# Altium PCB UPCD_lamp-R000.PcbDoc
Units mm, origin at the board's own origin, x right, y up, seen from the top; angles counter-clockwise.
Board outline 58.5 x 41.73 mm, 2 copper layers (Top Layer, Bottom Layer), stack 1.601 mm thick; 36 components, 19 nets, 104 pads, 154 vias.
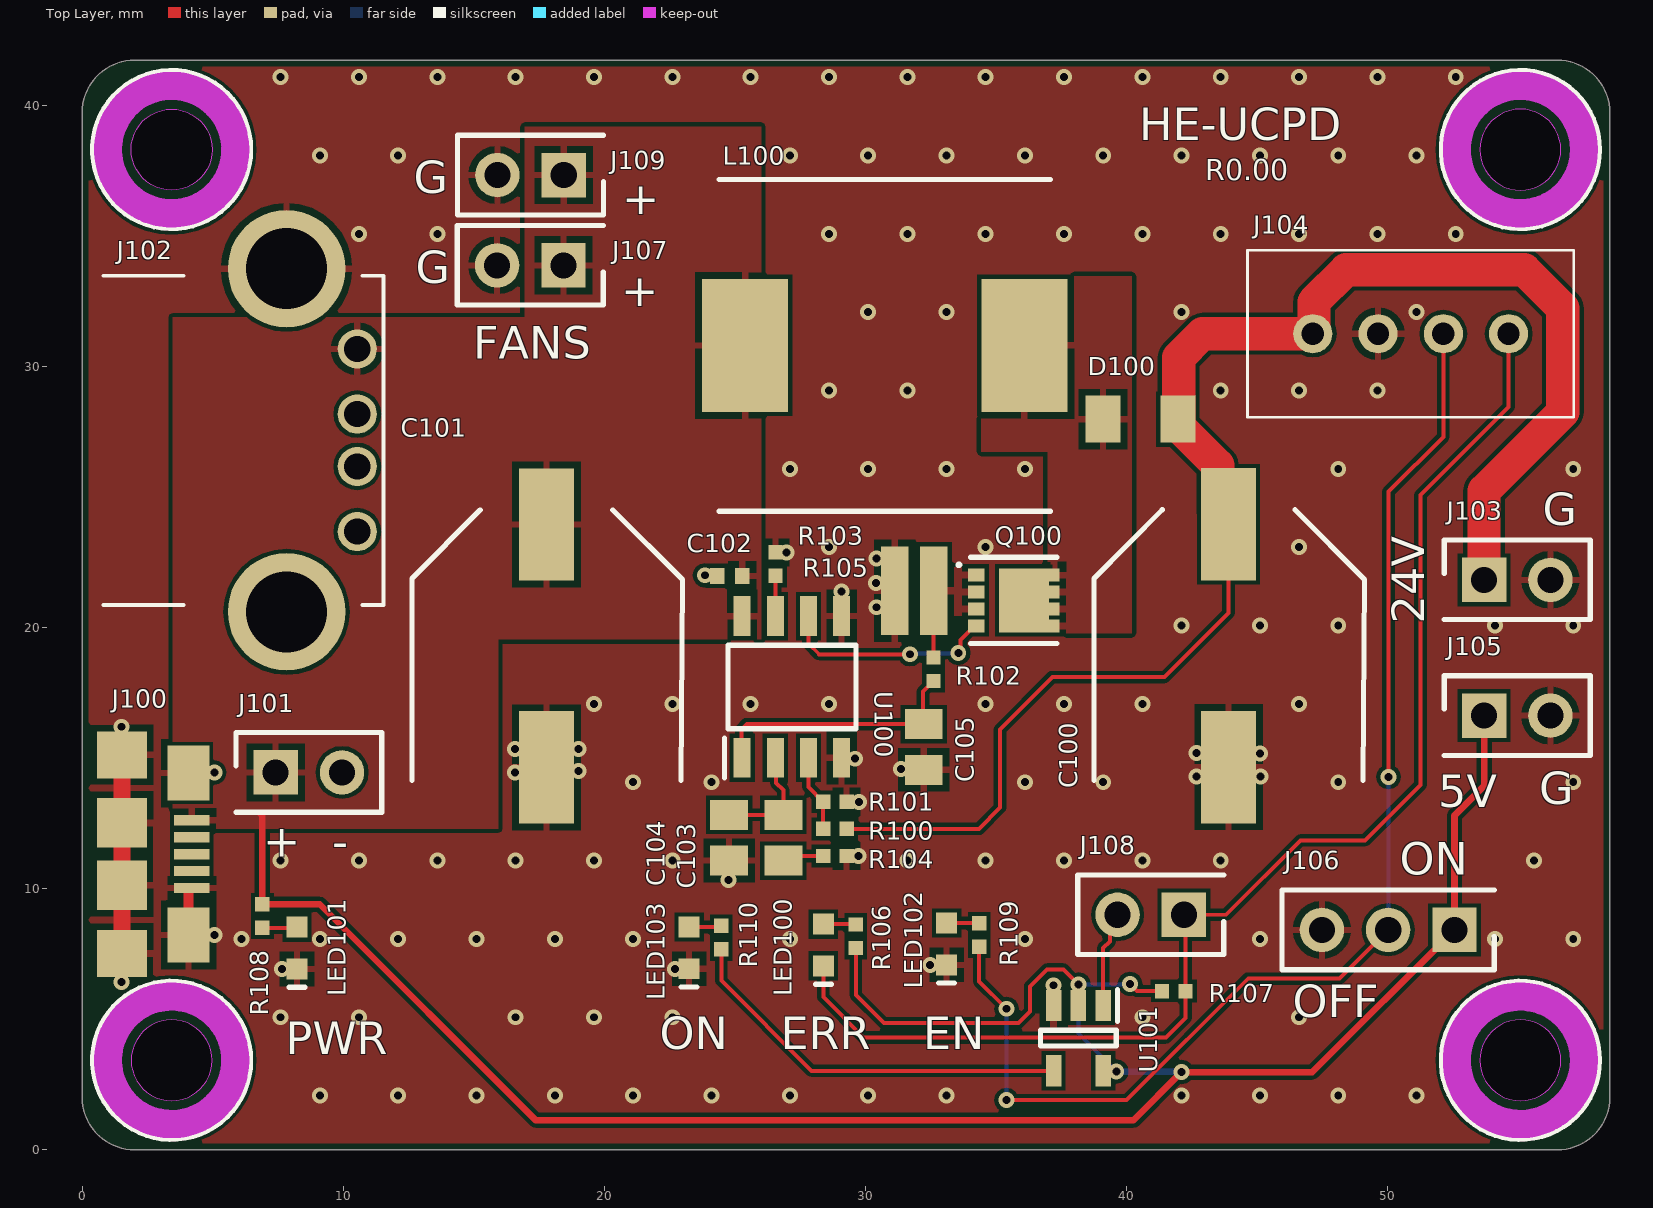
[diagram p0: Top Layer view]
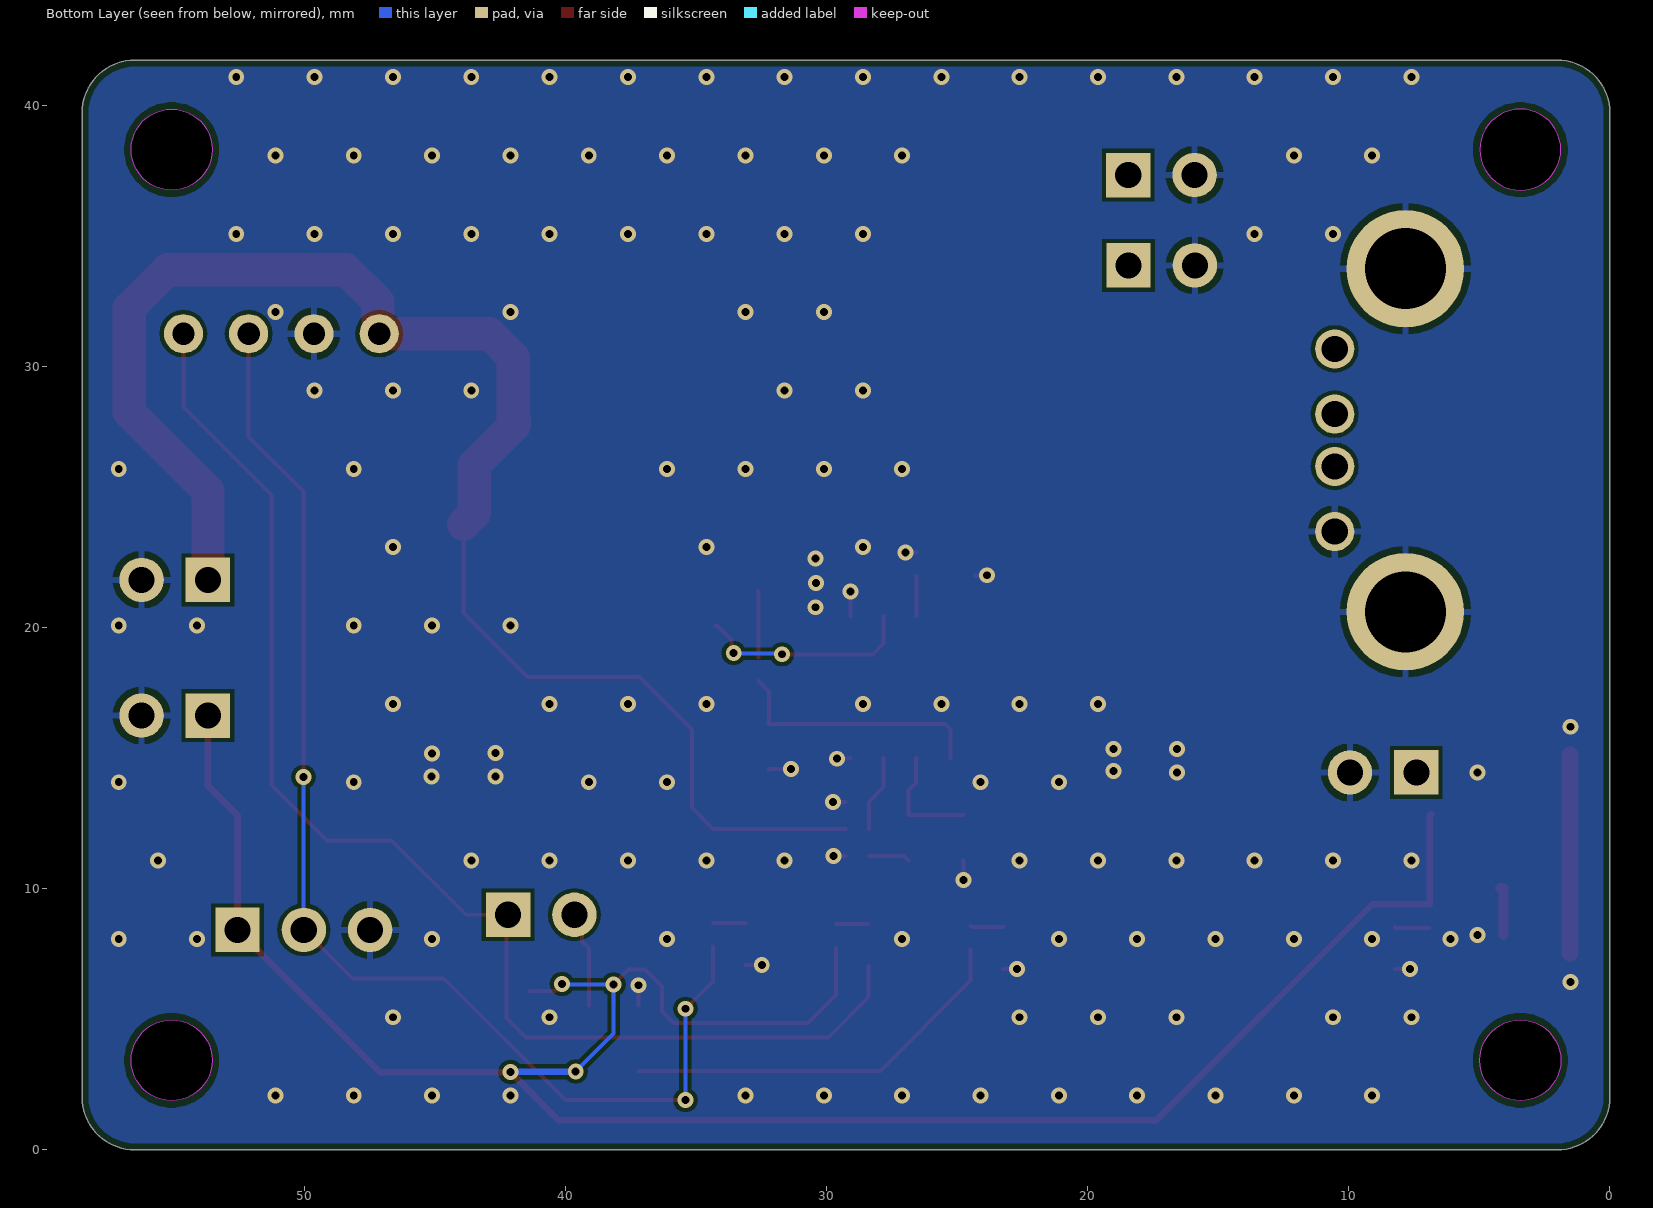
[diagram p1: Bottom Layer view, seen from below]
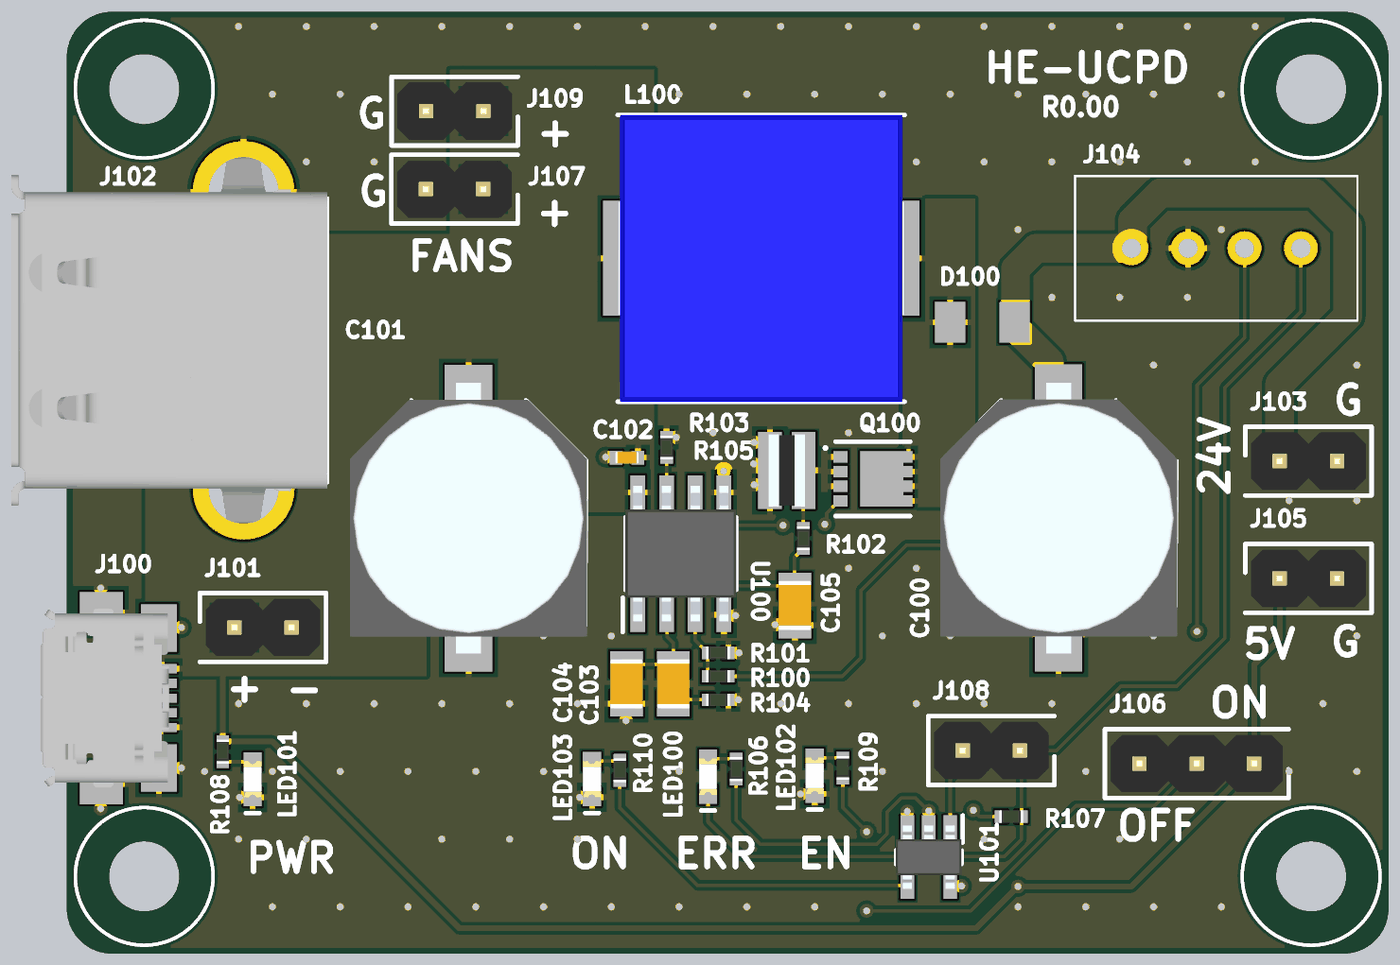
[diagram p2: 3D render of the assembled board from above, using the file's embedded part models]

## Layer stack, top to bottom
Top Solder: solder mask 0.0102, Solder Resist, Dk 3.5
Top Layer: signal copper 0.0356
Dielectric 1: dielectric 1.53, FR-4, Dk 4.8
Bottom Layer: signal copper 0.0356
Bottom Solder: solder mask 0.0102, Solder Resist, Dk 3.5

## Board outline
0,2 0,39.725 cw(c2,39.725) 2,41.725 56.5,41.725 cw(c56.5,39.725) 58.5,39.725 58.5,2 cw(c56.5,2) 56.5,0 2,0 cw(c2,2)
cut-out: 3.425,36.75 cw(c3.425,38.3) 1.875,38.3 cw(c3.425,38.3) 3.425,39.85 cw(c3.425,38.3) 4.975,38.3 cw(c3.425,38.3)
cut-out: 1.875,3.425 ccw(c3.425,3.425) 3.425,1.875 ccw(c3.425,3.425) 4.975,3.425 ccw(c3.425,3.425) 3.425,4.975 ccw(c3.425,3.425)
cut-out: 53.525,38.3 ccw(c55.075,38.3) 55.075,36.75 ccw(c55.075,38.3) 56.625,38.3 ccw(c55.075,38.3) 55.075,39.85 ccw(c55.075,38.3)
cut-out: 53.525,3.425 ccw(c55.075,3.425) 55.075,1.875 ccw(c55.075,3.425) 56.625,3.425 ccw(c55.075,3.425) 55.075,4.975 ccw(c55.075,3.425)

## Design rules (kind name [scope] priority, off if disabled: settings)
BoardOutlineClearance [All] p1: gap=0.254 ignorepadtopadclearanceinfootprint=FALSE
Clearance [All] p1: gap=0.152 ignorepadtopadclearanceinfootprint=FALSE
HoleSize [All] p1: absolutevalues=TRUE maxlimit=12.7 minlimit=0.025 maxpercent=80.000 minpercent=20.000
MinimumSolderMaskSliver [All] p1: minsoldermaskwidth=0.102
PolygonConnect [All] p1: thpad.connectstyle=Relief thpad.reliefconductorwidth=0.254 thpad.reliefentries=4 thpad.polygonreliefangle="90 Angle" thpad.airgapwidth=0.254 smdpad.connectstyle=Relief smdpad.reliefconductorwidth=0.254 smdpad.reliefentries=4 smdpad.polygonreliefangle="90 Angle" smdpad.airgapwidth=0.254 via.connectstyle=Direct via.reliefconductorwidth=0.254 via.reliefentries=4 via.polygonreliefangle="90 Angle" via.airgapwidth=0.254
RoutingVias [All] p1: holewidth=0.305 width=0.61 viastyle="Through Hole" minholewidth=0.305 minwidth=0.61 maxholewidth=0.711 maxwidth=1.27
SilkToSilkClearance [All] p1: silktosilkclearance=0.102
SilkToSolderMaskClearance [IsPad] p1: minsilkscreentomaskgap=0.102 clearancetoexposedcopper=TRUE
SolderMaskExpansion [All] p1: expansion=0.102
Width [All] p1: maxlimit=50.8 minlimit=0.152 preferedwidth=0.152
26 further rules are at their usual default settings.

## Classes and differential pairs
component class UCPD_lamp: C100 C101 C102 C103 C104 C105 D100 J100 J103 J104 J106 J108 J109 L100 LED100 LED101 LED102 LED103 Q100 R100 R101 R102 R103 R104 R105 R106 R107 R108 R109 R110 U100 U101

## Components (designator, comment, footprint, x,y, rotation, side; value= is the part's Value field where it differs from the comment)
C100 "EEH-ZA1V151P" CAPAE1030X1050N 43.9,19.3 r270 top value=150u
C101 "UUD1E221MNL1GS" CAPAE1030X1050N 17.78,19.296 r270 top value=220u
C102 "GRM155R70J104KA01D" CAPC1005X06N 24.795,21.975 r0 top value=100pF
C103 "CGA4J2C0G1H333J125AA" CAPC2012X14N 26.85,11.95 r90 top value=33n
C104 "C2012C0G1H152J060AA" CAPC2012X14N 24.775,11.95 r90 top value=1500p
C105 "08055A100JAT2A" CAPC2012X14N 32.225,15.425 r90 top value=10p
D100 "SS24FL" SOD-123FL 40.525,27.975 r0 top
J100 "10118192-0001LF" 10118192-0001LF 1.525,11.325 r270 top
J101 "PRPC002SAAN-RC" "HDR_1x2_0.100\"" 7.41,14.45 r0 top
J102 "292303-1" 292303-1 10.535,30.67 r270 top
J103 "PRPC002SAAN-RC" "HDR_1x2_0.100\"" 53.685,21.825 r0 top
J104 "B04B-XASK-1(LF)(SN)" B04B-XASK-1(LF)(SN) 54.625,31.25 r180 top
J105 "PRPC002SAAN-RC" "HDR_1x2_0.100\"" 53.685,16.625 r0 top
J106 "PRPC003SAAN-RC" "HDR 3x1 0.100\"" 52.553,8.421 r180 top
J107 "PRPC002SAAN-RC" "HDR_1x2_0.100\"" 18.431,33.869 r180 top
J108 "PRPC002SAAN-RC" "HDR_1x2_0.100\"" 42.19,9 r180 top
J109 "PRPC002SAAN-RC" "HDR_1x2_0.100\"" 18.44,37.325 r180 top
L100 "SRR1208-6R5ML" INDPM127127X850N 30.734,30.804 r0 top value=6u5
LED100 "150060VS75000" 0603_A 28.382,7.842 r90 top
LED101 "150060VS75000" 0603_A 8.225,7.725 r90 top
LED102 "150060VS75000" 0603_A 33.103,7.882 r90 top
LED103 "150060VS75000" 0603_A 23.244,7.732 r90 top
Q100 "CSD17304Q3" DQG_VSON-CLIP 35.678,21.037 r270 top
R100 "CRCW040218K2FKED" RESC1005X03N 28.825,12.287 r0 top value=18k2
R101 "CRCW04021K00FKEDC" RESC1005X03N 28.825,13.325 r180 top value=1k
R102 "CRCW0402100RFKEDC" RESC1005X03N 32.6,18.4 r90 top value=100R
R103 "CRCW040226K7FKED" RESC1005X03N 26.55,22.425 r270 top value=26k7
R104 "CRCW04024K87FKED" RESC1005X03N 28.825,11.25 r180 top value=4k87
R105 "PRL1632-R007-F-T1" RESC1632X60N 31.865,21.406 r0 top value=7m
R106 "RES: GENERAL" RESC1005X03N 29.625,8.175 r270 top value=287R
R107 "CRCW040218K2FKED" RESC1005X03N 41.8,6.075 r180 top value=18k2
R108 "RES: GENERAL" RESC1005X03N 6.9,8.95 r90 top value=287R
R109 "RES: GENERAL" RESC1005X03N 34.35,8.225 r270 top value=287R
R110 "RES: GENERAL" RESC1005X03N 24.475,8.125 r270 top value=287R
U100 "LM3478" SOIC127P600X175-8N 27.178,17.723 r90 top
U101 "SN74LVC1G126DBVR" SOT95P280X145-5N 38.15,4.275 r270 top

## Footprints (in the part's own frame and the unit in brackets; to place one, negate y for a bottom-side part, rotate by r counter-clockwise, add the part's x,y. Pads: shape width x height; smd on the part's side, far side on the other; paste and mask are expansions set on the pad)
0603_A [mm] "Chip LED, 2-Leads, Body 1.6x0.8mm, IPC Medium Density"
  rect 0.8x0.8 smd: 1(-0.8,0) 2(0.8,0)
  silkscreen extent -1.5,-0.3 -1.5,0.3, body extent -0.8,-0.4 0.8,0.4, height 0.7
292303-1 [mm] "CONN RCPT USB2.0 TYPEA 4POS R/A"
  round 1.5 hole 1: 1(0,0) 2(2.5,0) 3(4.5,0) 4(7,0)
  round 4.5 hole 3.1: 5(-3.07,-2.71) 6(10.07,-2.71)
  silkscreen extent -2.8,-9.72 9.8,1.01, body extent -4.62,-13 11.62,1, height 7.82
10118192-0001LF [mm] "SMD, 5-Leads, Body 8.05x5.77mm, Pitch 0.65mm"
  rect 0.4x1.35 smd: 1(-1.3,2.675) 2(-0.65,2.675) 3(0,2.675) 4(0.65,2.675) 5(1.3,2.675)
  rect 2.1x1.6 smd: 6(-3.1,2.55) 7(3.1,2.55)
  rect 1.8x1.9 smd: 8(-3.8,0) 9(3.8,0)
  rect 1.9x1.9 smd: 10(-1.2,0) 11(1.2,0)
  body extent -3.96,-2.67 3.96,2.99, height 2.75
B04B-XASK-1(LF)(SN) [mm]
  round 1.5 hole 0.85: 1(0,0) 2(2.5,0) 3(5,0) 4(7.5,0)
  silkscreen extent -2.5,-3.2 10,3.2
CAPAE1030X1050N [mm]
  rect 4.3x2.1 smd: 1(-4.65,0) 2(4.65,0)
  silkscreen extent -5.21,-5.15 5.15,5.21, body extent -6,-5.25 6,5.25, height 10.5
CAPC1005X06N [mm] "Chip Capacitor, 2-Leads, Body 1.00x0.50mm, IPC Medium Density (0402)"
  rect 0.56x0.62 smd: 1(-0.48,0) 2(0.48,0)
  body extent -0.53,-0.28 0.53,0.28, height 0.55
CAPC2012X14N [mm] "Chip Capacitor, 2-Leads, Body 2.00x1.25mm, IPC Medium Density (0805)"
  rect 1.15x1.45 smd: 1(-0.875,0) 2(0.875,0)
  body extent -1.1,-0.72 1.1,0.72, height 1.45
DQG_VSON-CLIP [mm]
  rect 0.5x0.63 smd: 1(-0.975,-1.435) 2(-0.325,-1.435) 3(0.325,-1.435) 4(0.975,-1.435)
  rect 0.5x0.41 smd: 5(0.975,1.545) 6(0.325,1.545) 7(-0.325,1.545) 8(-0.975,1.545)
  rect 2.45x1.9 smd: 9(0,0.39)
  silkscreen extent -1.65,-2.13 1.65,1.65
"HDR 3x1 0.100\"" [mm]
  rect 1.7x1.7 / inner round 1.7 / far side rect 1.7x1.7 hole 1: 1(0,0)
  round 1.7 hole 1: 2(2.54,0) 3(5.08,0)
  silkscreen extent -1.52,-1.52 6.6,1.52, body extent -1.27,-1.27 6.35,1.27, height 7.62
"HDR_1x2_0.100\"" [mm]
  rect 1.7x1.7 / inner round 1.7 / far side rect 1.7x1.7 hole 1: 1(0,0)
  round 1.7 hole 1: 2(2.54,0)
  silkscreen extent -1.52,-1.52 4.06,1.52, body extent -1.27,-1.27 3.81,1.27, height 7.62
INDPM127127X850N [mm]
  rect 3.3x5.1 smd: 1(-5.35,0) 2(5.35,0)
  silkscreen extent -6.35,-6.35 6.35,6.35, body extent -6.35,-6.35 6.35,6.35, height 8.5
RESC1005X03N [mm] "Chip Resistor, 2-Leads, Body 1.00x0.50mm, IPC Medium Density"
  rect 0.55x0.55 smd: 1(-0.45,0) 2(0.45,0)
  body extent -0.53,-0.28 0.53,0.28, height 0.35
RESC1632X60N [mm]
  rect 1.05x3.4 smd: 1(-0.75,0) 2(0.75,0)
  body extent -0.8,-1.6 0.8,1.6, height 0.6
SOD-123FL [mm]
  rect 1.34x1.8 smd: 1(-1.43,0) 2(1.43,0)
  body extent -1.5,-1 1.5,1, height 1.08
SOIC127P600X175-8N [mm]
  rect 1.525x0.65 smd: 1(-2.712,1.905) 2(-2.712,0.635) 3(-2.712,-0.635) 4(-2.712,-1.905) 5(2.712,-1.905) 6(2.712,-0.635) 7(2.712,0.635) 8(2.712,1.905)
  silkscreen extent -3.47,-2.45 1.6,2.58, body extent -3,-2.45 3,2.45, height 1.75
SOT95P280X145-5N [mm]
  rect 1.2x0.6 smd: 1(-1.25,0.95) 2(-1.25,0) 3(-1.25,-0.95) 4(1.25,-0.95) 5(1.25,0.95)
  silkscreen extent -1.85,-1.45 0.3,1.5, body extent -1.4,-1.45 1.4,1.45, height 1.45

## Part data
C100: "CAP ALUM POLY HYB 150UF 35V SMD", Manufacturer=Panasonic, Package="Radial, Can - SMD", Supplier Part Number 1=P15450CT-ND, Voltage=35V, Accuracy=20%, Manufacturer Part Number=EEH-ZA1V151P, Supplier 1=Digi-Key, Type=Aluminum
C101: "CAP ALUM 220UF 20% 25V SMD", Manufacturer=Nichicon, Package="Radial, Can - SMD", Supplier Part Number 1=493-2278-1-ND, Voltage=25V, Accuracy=20%, Manufacturer Part Number=UUD1E221MNL1GS, Supplier 1=Digi-Key, Type=Aluminum
C102: "CAP CER 0.1UF 6.3V X7R 0402", Manufacturer=Murata, Package=0402(1005m), Supplier Part Number 1=490-6319-1-ND, Voltage=6V3, Manufacturer Part Number=GRM155R70J104KA01D, Supplier 1=Digi-Key
C103: "CAP CER 0.033UF 50V C0G 0805", Manufacturer=TDK, Package=0805(2012m), Supplier Part Number 1=445-6950-1-ND, Voltage=50V, Accuracy=5%, Manufacturer Part Number=CGA4J2C0G1H333J125AA, Supplier 1=Digi-Key
C104: "CAP CER 1500PF 50V C0G 0805", Manufacturer=TDK, Package=0805(2012m), Supplier Part Number 1=445-1331-1-ND, Voltage=50V, Accuracy=5%, Manufacturer Part Number=C2012C0G1H152J060AA, Supplier 1=Digi-Key
C105: "CAP CER 10PF 50V C0G/NP0 0805", Manufacturer=AVX, Package=0805(2012m), Supplier Part Number 1=478-1304-1-ND, Voltage=50V, Accuracy=5%, Manufacturer Part Number=08055A100JAT2A, Supplier 1=Digi-Key
D100: "DIODE SCHOTTKY 40V 2A SOD123F", Manufacturer="ON Semiconductor", Supplier Part Number 1=SS24FLCT-ND, Manufacturer Part Number=SS24FL, Supplier 1=Digi-Key
J100: "CONN Micro USB B Type Receptacle", Color=Black, Current Rating=1.8A, Flammability Rating=UL94V-0, Insulation Resistance=1000MOhms, Manufacturer=FCI, Operating Temperature Range=-55Cto+85C, Supplier Part Number 1=609-4613-1-ND, Brand=FCI, Connector Type=MicroUSBTypeBreceptacle, Contact Material=CopperAlloy, Contact Plating=Gold, Datasheet URL=http://www.mouser.com/ds/2/154/10118192-793027.pdf, Datasheet Version="Rev. B, 05/2015", Factory Pack Quantity=1400, Gender=Female, Manufacturer Part Number=10118192-0001LF, Manufacturer URL=http://www.fci.com/, Mounting Angle=Right, Number of Contacts=5Contact, Packaging=Reel, Product=MicroUSBTypeBConnectors, Product Category=USBConnectors, RoHS=Details, Standard=USB2.0, Supplier 1=Digi-Key, Termination Style=SMD/SMT
J101 J103 J105 J107 J108 J109: "CONN HEADER VERT 2POS 2.54MM", Manufacturer=Sullins, Package=T/H, Supplier Part Number 1=S1011EC-02-ND, Manufacturer Part Number=PRPC002SAAN-RC, Pitch="0.100\"", Properties=1x2, Supplier 1=Digi-Key
J102: "CONN USB2.0 TYPEA 4POS R/A", Manufacturer="TE Connectivity", Supplier Part Number 1=A31726-ND, Manufacturer Part Number=292303-1, Supplier 1=Digi-Key
J104: "CONN HEADER VERT 4POS 2.5MM", Manufacturer=JST, Supplier Part Number 1=455-1994-ND, Manufacturer Part Number=B04B-XASK-1(LF)(SN), Supplier 1=Digi-Key
J106: "CONN HEADER VERT 3POS 2.54MM", Manufacturer=Sullins, Supplier Part Number 1=S1011EC-03-ND, Manufacturer Part Number=PRPC003SAAN-RC, Supplier 1=Digi-Key
L100: "FIXED IND 6.5UH 6A 18 MOHM SMD", Manufacturer=Bourns, Supplier Part Number 1=SRR1208-6R5MLCT-ND, Manufacturer Part Number=SRR1208-6R5ML, Supplier 1=Digi-Key
LED100 LED101 LED102 LED103: library part CMP-1426-00006-1, "SMD mono-color Chip LED, WL-SMCW, Bright Green", Color="Bright Green", Distributor Part Number=732-4980-1-ND, Manufacturer="Wuerth Elektronik", ComponentLink1Description="Manufacturer URL", ComponentLink1URL=http://www.we-online.com, ComponentLink2Description=Datasheet, ComponentLink2URL=http://katalog.we-online.com/led/datasheet/150060VS75000.pdf, Distributor=Digi-Key, Manufacturer Part Number=150060VS75000, PackageReference=0603_A, Supplier 1=Digi-Key, Supplier Part Number 1=732-4980-1-ND
Q100: "MOSFET (N-Channel)", Manufacturer_Name="Texas Instruments", Mouser Part Number=595-CSD17304Q3, Datasheet Link=http://www.ti.com/lit/gpn/csd17304q3, Manufacturer_Part_Number=CSD17304Q3, Mouser Price/Stock=https://www.mouser.com/Search/Refine.aspx?Keyword=595-CSD17304Q3
R100 R107: "RES SMD 18.2K OHM 1% 1/16W 0402", Manufacturer="Vishay Dale", Package=0402, Power=0.063W, Supplier Part Number 1=541-18.2KLCT-ND, Accuracy=1%, Manufacturer Part Number=CRCW040218K2FKED, Supplier 1=Digi-Key
R101: "RES SMD 1K OHM 1% 1/16W 0402", Manufacturer="Vishay Dale", Package=0402, Power=0.063W, Supplier Part Number 1=541-3961-1-ND, Accuracy=1%, Manufacturer Part Number=CRCW04021K00FKEDC, Supplier 1=Digi-Key
R102: "RES SMD 100 OHM 1% 1/16W 0402", Manufacturer="Vishay Dale", Package=0402, Power=0.63W, Supplier Part Number 1=541-3962-1-ND, Accuracy=1%, Manufacturer Part Number=CRCW0402100RFKEDC, Supplier 1=Digi-Key
R103: "RES SMD 26.7K OHM 1% 1/16W 0402", Manufacturer="Vishay Dale", Package=0402, Power=.063W, Supplier Part Number 1=541-26.7KLCT-ND, Accuracy=1%, Manufacturer Part Number=CRCW040226K7FKED, Supplier 1=Digi-Key
R104: "RES SMD 4.87K OHM 1% 1/16W 0402", Manufacturer="Vishay Dale", Package=0402, Power=.063W, Supplier Part Number 1=541-4.87KLCT-ND, Accuracy=1%, Manufacturer Part Number=CRCW04024K87FKED, Supplier 1=Digi-Key
R105: "RES 0.007 OHM 1W 1206 WIDE", Manufacturer=Susumu, Package=1206(3216m), Power=1W, Supplier Part Number 1=PRL1632.007FCT-ND, Accuracy=1%, Manufacturer Part Number=PRL1632-R007-F-T1, Supplier 1=Digi-Key
R106 R108 R109 R110: Manufacturer=Yageo, Manufacturer Part Number=YAG3089CT-ND, Supplier Part Number 1=RC0402FR-07287RL, Supplier 1=Digi-Key
U100: "IC REG CTRLR MULT TOPOLOGY 8SOIC", Manufacturer="Texas Instruments", Manufacturer Part Number=LM3478MAX/NOPB, Mouser Part Number=926-LM3478MA/NOPB, RS Part Number=8115560P, Supplier Part Number 1=296-38111-1-ND, Datasheet Link=http://www.ti.com/lit/gpn/lm3478, Height=1.75mm, Mouser Price/Stock=https://www.mouser.co.uk/ProductDetail/Texas-Instruments/LM3478MA-NOPB?qs=8BDZloOR%252BZH9CVb1MduuNw%3D%3D, RS Price/Stock=http://uk.rs-online.com/web/p/products/8115560P, Supplier 1=Digi-Key
U101: "IC BUF NON-INVERT 5.5V SOT23-5", Manufacturer="Texas Instruments", Mouser Part Number=595-SN74LVC1G126DBVR, RS Part Number=7968240P, Supplier Part Number 1=296-11605-1-ND, Datasheet Link=http://www.ti.com/lit/ds/symlink/sn74lvc1g126.pdf, Height=1.45mm, Manufacturer Part Number=SN74LVC1G126DBVR, Mouser Price/Stock=https://www.mouser.com/Search/Refine.aspx?Keyword=595-SN74LVC1G126DBVR, RS Price/Stock=http://uk.rs-online.com/web/p/products/7968240P, Supplier 1=Digi-Key

## Via types
v1: diameter 0.61, hole 0.305, Top Layer to Bottom Layer, tented both sides, 151 vias
v2: diameter 0.61, hole 0.3, Top Layer to Bottom Layer, tented both sides, 2 vias
v3: diameter 0.61, hole 0.305, Top Layer to Bottom Layer, 1 vias

## Nets (pads, with @x,y where several pads share a name; then routed paths per layer and width w, separated by ;. In a path a pad name is that pad's centre, name@x,y a point inside that pad or via, vN(x,y) a via of type N, cw(c..) or ccw(c..) an arc to the next point about the centre after c; other vN are vias at no path point)
EN: J104.2 J106.2 R109.2 | length 47.3
  Top Layer w0.152: R109.2 34.35,6.45 v1(35.4,5.4) ; v1(35.4,1.9) 40,1.9 44.654,6.554 48.146,6.554 J106.2 ; v1(50.025,14.275) 50.025,25.2 52.125,27.3 J104.2
  Bottom Layer w0.152: v1(35.4,1.9) v1(35.4,5.4) ; J106.2 50.019,8.427 50.019,14.269 v1(50.025,14.275)
ERROR: J104.1 J108.1 LED100.1 R107.1 | length 49.8
  Top Layer w0.152: LED100.1 28.382,5.843 29.925,4.3 41.5,4.3 42.25,5.05 R107.1 42.25,8.94 J108.1 43.8,9 46.65,11.85 49.125,11.85 51.25,13.975 51.25,25.075 54.625,28.45 J104.1
FB: R100.1 R101.2 U100.3 | length 3
  Top Layer w0.152: U100.3 27.813,13.887 R101.2 R100.1
GND: C100.2 C101.2 C102.1 C104.1 C105.1 J100.5 J100.6 J100.7 J100.8 J100.9 J100.10 J100.11 J101.2 J102.4 J102.5 J102.6 J103.2 J104.3 J105.2 J106.3 J107.2 J109.2 LED101.1 LED102.1 LED103.1 R101.1 R103.1 R104.1 R105.1 U100.4 U100.5 U101.3 | length 17
  Top Layer w0.152: v1(7.65,6.925) LED101.1 ; v1(22.7,6.925) 23.237,6.925 LED103.1 ; v1(23.85,22) 24.29,22 C102.1 ; v1(24.75,10.325) 24.75,11.05 C104.1 ; R103.1 v1(26.975,22.875) ; v3(29.075,21.375) 29.075,20.443 U100.5 ; U100.4 29.119,14.975 v1(29.6,14.975) ; R104.1 v1(29.725,11.25) ; R101.1 v1(29.75,13.325) ; v1(31.35,14.575) 32.2,14.575 C105.1 ; v1(32.475,7.075) 33.096,7.075 LED102.1 ; U101.3 v1(37.2,6.3)
  Top Layer w0.381: J100.7 4.075,10.015 4.085,10.025 J100.5
  Top Layer w0.635: J100.9 J100.11 J100.10 J100.8
  other v1: 9.1,2.075 12.1,2.075 15.1,2.075 18.1,2.075 21.1,2.075 24.1,2.075 27.1,2.075 30.1,2.075 33.1,2.075 42.1,2.075 45.1,2.075 48.1,2.075 51.1,2.075 7.6,5.075 10.6,5.075 16.6,5.075 19.6,5.075 22.6,5.075 40.6,5.075 46.6,5.075 6.1,8.075 9.1,8.075 12.1,8.075 15.1,8.075 18.1,8.075 21.1,8.075 27.1,8.075 36.1,8.075 45.1,8.075 54.1,8.075 57.1,8.075 5.075,8.225 7.6,11.075 10.6,11.075 13.6,11.075 16.6,11.075 19.6,11.075 22.6,11.075 31.6,11.075 34.6,11.075 37.6,11.075 40.6,11.075 43.6,11.075 55.6,11.075 21.1,14.075 24.1,14.075 36.1,14.075 39.1,14.075 48.1,14.075 57.1,14.075 42.675,14.3 45.125,14.3 5.075,14.45 16.575,14.45 19,14.5 45.1,15.175 42.675,15.2 16.575,15.35 19,15.35 19.6,17.075 22.6,17.075 25.6,17.075 28.6,17.075 34.6,17.075 37.6,17.075 40.6,17.075 46.6,17.075 42.1,20.075 45.1,20.075 48.1,20.075 54.1,20.075 57.1,20.075 30.425,20.775 30.4,21.7 30.425,22.65 28.6,23.075 34.6,23.075 46.6,23.075 27.1,26.075 30.1,26.075 33.1,26.075 36.1,26.075 48.1,26.075 57.1,26.075 28.6,29.075 31.6,29.075 43.6,29.075 46.6,29.075 49.6,29.075 30.1,32.075 33.1,32.075 42.1,32.075 51.1,32.075 10.6,35.075 13.6,35.075 28.6,35.075 31.6,35.075 34.6,35.075 37.6,35.075 40.6,35.075 43.6,35.075 46.6,35.075 49.6,35.075 52.6,35.075 9.1,38.075 12.1,38.075 27.1,38.075 30.1,38.075 33.1,38.075 36.1,38.075 39.1,38.075 42.1,38.075 45.1,38.075 48.1,38.075 51.1,38.075 7.6,41.075 10.6,41.075 13.6,41.075 16.6,41.075 19.6,41.075 22.6,41.075 25.6,41.075 28.6,41.075 31.6,41.075 34.6,41.075 37.6,41.075 40.6,41.075 43.6,41.075 46.6,41.075 49.6,41.075 52.6,41.075
  other v2: 1.5,6.425 1.5,16.2
NetC103_1: C103.1 R104.2 | length 1.6
  Top Layer w0.152: C103.1 27.025,11.25 R104.2
NetC103_2: C103.2 C104.2 U100.2 | length 4.4
  Top Layer w0.152: C104.2 C103.2 26.85,13.775 26.575,14.05 26.575,14.979 U100.2
NetC105_2: C105.2 R102.1 U100.1 | length 10
  Top Layer w0.152: U100.1 25.25,15.034 25.25,16.1 25.45,16.3 C105.2 32.2,16.325 32.2,17.55 R102.1
NetD100_1: D100.1 L100.2 Q100.5 Q100.6 Q100.7 Q100.8
NetJ108_2: J108.2 U101.1 | length 3.7
  Top Layer w0.152: U101.1 39.1,7.725 39.354,7.979 39.354,8.704 J108.2
NetLED100_2: LED100.2 R106.1 | length 1.3
  Top Layer w0.152: LED100.2 29.608,8.642 R106.1
NetLED101_2: LED101.2 R108.1 | length 1.3
  Top Layer w0.152: R108.1 8.2,8.5 LED101.2
NetLED102_2: LED102.2 R109.1 | length 1.2
  Top Layer w0.152: LED102.2 34.343,8.682 R109.1
NetLED103_2: LED103.2 R110.1 | length 1.2
  Top Layer w0.152: LED103.2 24.432,8.532 R110.1
NetQ100_1: Q100.1 Q100.2 Q100.3 R102.2 R105.2 | length 2.6
  Top Layer w0.152: R102.2 32.6,21.391 R105.2
NetQ100_4: Q100.4 U100.6 | length 8.3
  Top Layer w0.152: U100.6 27.813,19.387 28.225,18.975 v1(31.7,18.975) ; v1(33.55,19.025) 33.637,19.112 33.637,19.521 34.178,20.062 Q100.4
  Bottom Layer w0.152: v1(31.7,18.975) 31.725,19 33.525,19 v1(33.55,19.025)
NetR103_2: R103.2 U100.7 | length 1.5
  Top Layer w0.152: U100.7 26.543,21.968 R103.2
NetR110_2: R110.2 U101.4 | length 15.4
  Top Layer w0.152: R110.2 24.475,6.475 27.925,3.025 U101.4
VCC_5V: C101.1 C102.2 J100.1 J101.1 J102.1 J105.1 J106.1 J107.1 J109.1 L100.1 R106.2 R107.2 R108.2 U100.8 U101.2 U101.5 | length 87.2
  Top Layer w0.152: R106.2 29.625,5.925 30.7,4.85 35.85,4.85 36.3,5.3 36.3,6.25 36.95,6.9 37.575,6.9 v1(38.15,6.325) U101.2 ; v1(40.125,6.35) 40.4,6.075 R107.2
  Top Layer w0.254: 6.85,12.85 6.9,12.8 R108.2 9.1,9.4 17.375,1.125 40.25,1.125 v1(42.1,2.975) 47.107,2.975 J106.1 52.553,12.803 53.685,13.935 J105.1
  Bottom Layer w0.152: v1(39.6,3) 38.15,4.45 v1(38.15,6.325) 38.163,6.338 40.113,6.338 v1(40.125,6.35)
  Bottom Layer w0.254: v1(39.6,3) 39.612,2.987 42.088,2.987 v1(42.1,2.975)
VCC_24V: C100.1 D100.2 J103.1 J104.4 R100.2 | length 59.5
  Top Layer w0.152: R100.2 34.337,12.287 35.15,13.1 35.15,16.1 37.15,18.1 41.45,18.1 43.9,20.55 C100.1
  Top Layer w1.27: C100.1 43.485,24.365 43.485,26.215 41.955,27.745 D100.2 41.99,28.01 41.99,30.34 42.9,31.25 J104.4 47.169,31.294 47.169,32.469 48.4,33.7 55.225,33.7 56.7,32.225 56.7,28.25 53.685,25.235 J103.1
pads on no net: J100.2 J100.3 J100.4 J102.2 J102.3 Q100.9

## Polygon pours and split planes (outlines as drawn)
GND on Top Layer "Top Layer-GND" (solid, pour order 9): -2.375,43.425 -2.375,-3.175 61.45,-3.175 61.45,43.55
NetQ100_1 on Top Layer "Top Layer-NetQ100_1" (solid, pour order 8): 34.575,22.3 32.125,22.3 32.125,20.45 34.575,20.45
NetD100_1 on Top Layer "Top Layer-NetD100_1" (solid, pour order 4): 36.975,19.775 36.975,26.725 34.425,26.725 34.425,33.45 40.2,33.45 40.2,19.775
VCC_5V on Top Layer "Top Layer-VCC_5V" (solid, pour order 2): 3.475,12.3 15.925,12.3 15.925,19.55 26,19.55 26,39.175 16.95,39.175 16.95,31.875 3.475,31.875
GND on Bottom Layer "Bottom Layer-GND" (solid, pour order 0): -0.025,42.2 -0.025,-2.7 69.9,-2.7 69.9,42.175

## Keep-outs
Top Layer:
  circle w1.2: c55.075,3.425 r2.5
  circle w1.2: c55.075,38.3 r2.5
  circle w1.2: c3.425,3.425 r2.5
  circle w1.2: c3.425,38.3 r2.5
  region: 1.935,38.752

## Silkscreen, mask and mechanical layers (free items; w line width, h text height)
Top Overlay:
  circle w0.152: c3.425,3.425 r3.05
  circle w0.152: c55.075,3.425 r3.05
  circle w0.152: c55.075,38.3 r3.05
  circle w0.152: c3.425,38.3 r3.05
  text "HE-UCPD" at 40.475,38.65 h1.25
  text "R0.00" at 43,37.125 h0.8
  text "G" at 12.7,36.625 h1.25
  text "+" at 20.675,35.825 h1.25
  text "G" at 12.775,33.175 h1.25
  text "+" at 20.65,32.3 h1.25
  text "FANS" at 14.975,30.3 h1.25
  text "G" at 55.925,23.925 h1.25
  text "24V" at 51.4,20.15 h1.25 r90
  text "G" at 55.8,13.225 h1.25
  text "5V" at 51.925,13.125 h1.25
  text "+" at 6.925,11.225 h1.25
  text "-" at 9.575,11.175 h1.25
  text "ON" at 50.45,10.525 h1.25
  text "OFF" at 46.35,5.075 h1.25
  text "ON" at 22.125,3.85 h1.25
  text "ERR" at 26.75,3.85 h1.25
  text "EN" at 32.2,3.85 h1.25
  text "PWR" at 7.8,3.65 h1.25
Mechanical 1:
  circle w0.152: c3.425,3.425 r1.55
  circle w0.152: c55.075,3.425 r1.55
  circle w0.152: c55.075,38.3 r1.55
  circle w0.152: c3.425,38.3 r1.55
  lines w0.152: 0,2 ccw(c2,2) 2,0 56.5,0 ccw(c56.5,2) 58.5,2 58.5,39.725 ccw(c56.5,39.725) 56.5,41.725 2,41.725 ccw(c2,39.725) 0,39.725 0,2

## Text inside footprints (layer, text, board x,y; h text height)
J100: Mechanical 13 "PCB Edge" at 0.509,22.374 h0.75 r270